# EAGLE board schematics (EAGLE 9.0.0)
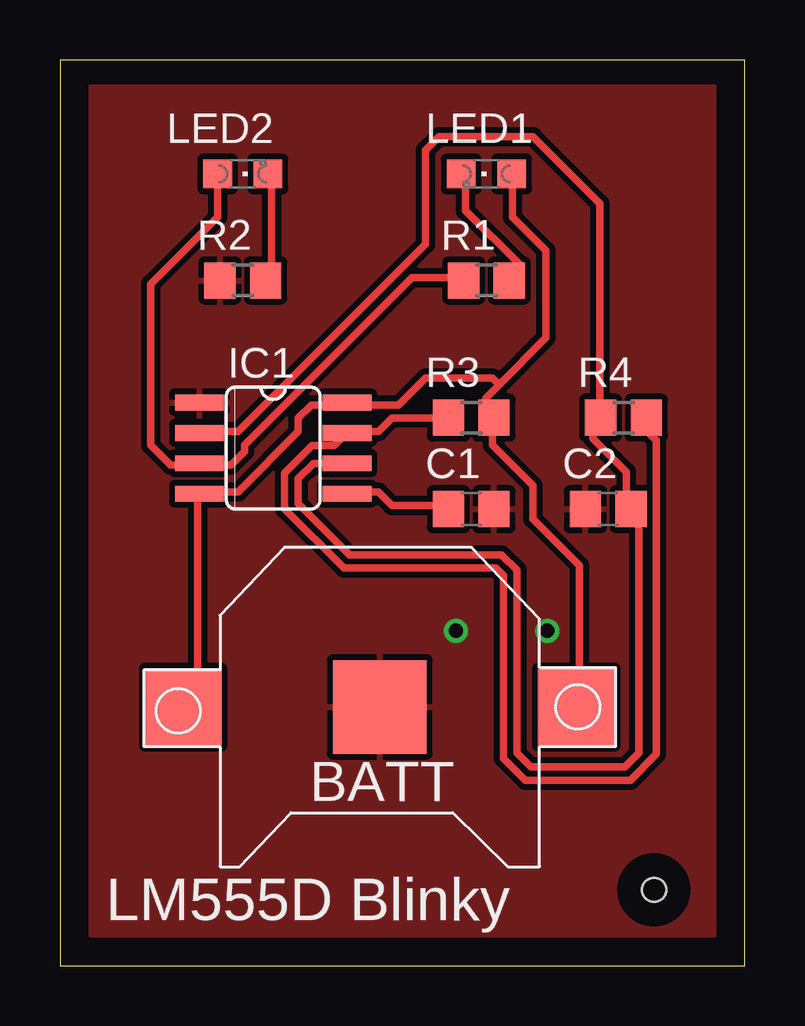
[diagram p0: board, top side]
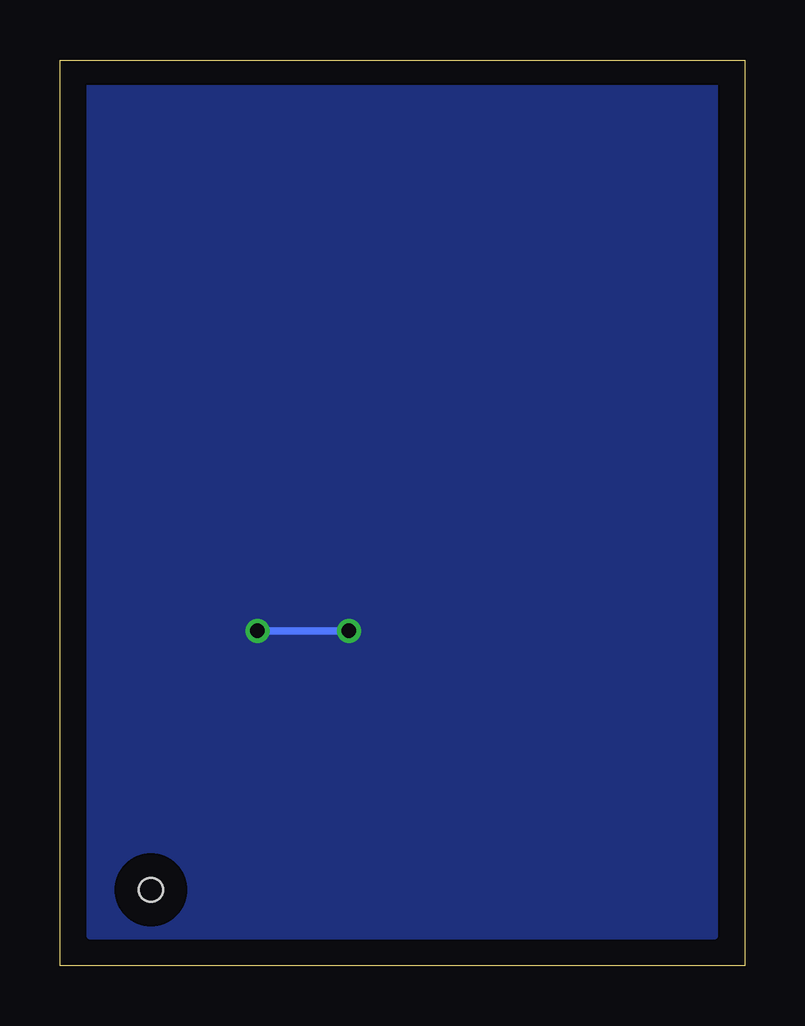
[diagram p1: board, bottom side, seen from below]

Size 28.55 x 37.77 mm. Coordinates in mm from the lower left corner, seen from the top.
Outline: 0,0 28.55,0 28.55,37.77 0,37.77 0,0
Copper layers (1*16): Top 0.035mm / dielectric 1.5mm / Bottom 0.035mm
Design rules "default": minimum track width 6mil, minimum drill 0.35mm, track to track 6mil, track to pad 6mil, pad to pad 6mil, via to via 6mil, smd to smd 6mil, copper to edge 40mil, drill to drill 6mil, minimum pad ring 10mil, minimum via ring 8mil, stop-mask expansion 4mil, vias tented up to drill 0mil, thermal gap 10mil
Net classes: 0 default: width 0.305 mm, drill 0.508 mm, clearance 0.254 mm
Holes 1 mm at 24.76,3.18

## Footprints (pad centres in the part's own frame; a part is rotated, then mirrored left to right if it is on the bottom)
CR1220-SMD = smd 3.2 x 3.2: +$1 -8.2,0; +$2 8.2,0 | smd 3.9 x 3.9: - 0,0
C0805 = smd 1.3 x 1.5: 1 -0.95,0; 2 0.95,0
SO08 = smd 0.66 x 2.032: 1 -1.905,-3.073; 2 -0.635,-3.073; 3 0.635,-3.073; 4 1.905,-3.073; 5 1.905,3.073; 6 0.635,3.073; 7 -0.635,3.073; 8 -1.905,3.073
CHIPLED_0805 = smd 1.2 x 1.2: A 0,-1.05; C 0,1.05
R0805 = smd 1.3 x 1.5: 1 -0.95,0; 2 0.95,0

## Placement (x,y rotation side)
BATT  CR1220  [CR1220-SMD]  13.34,10.79 180 top
C1  0.1uF  [C0805]  17.14,19.05 0 top
C2  22uF  [C0805]  22.86,19.05 180 top
IC1  LM555D  [SO08]  8.89,21.59 270 top
LED1  GREEN  [CHIPLED_0805]  17.78,33.02 90 top
LED2  GREEN  [CHIPLED_0805]  7.62,33.02 270 top
R1  100  [R0805]  17.78,28.57 0 top
R2  100  [R0805]  7.62,28.57 0 top
R3  1K  [R0805]  17.14,22.86 0 top
R4  100K  [R0805]  23.49,22.86 0 top

## Library data of the parts
BATT IC1 LED1 LED2 = adafruit
C1 C2 R1-R4 = resistor

## Nets
CONN: C2.1 IC1.2 IC1.6 R4.1
GND: BATT.- C1.2 C2.2 IC1.1 R2.1
N$1: IC1.3 LED2.A R1.1
N$2: LED1.C R1.2
N$3: LED2.C R2.2
N$4: IC1.7 R3.1 R4.2
N$7: C1.1 IC1.5
V+: BATT.+$1 BATT.+$2 IC1.4 IC1.8 LED1.A R3.2

## Tracks (layer width: path | path; a pad name or v marks a point on that pad's centre or on a via)
CONN
  Top 0.305: IC1.2 6.02,22.28 7.42,22.28 15.24,30.1 15.24,34.01 15.8,34.57 19.71,34.57 22.5,31.78 22.5,23.11 R4.1 22.5,22.84 22.22,22.55 22.22,22 23.62,20.6 23.62,19.2 C2.1 24.13,18.73 24.13,8.89 23.55,8.31 19.63,8.31 19.05,8.89 19.05,16.51 18.41,17.14 12.06,17.14 9.93,19.28 9.93,20.32 10.57,20.96 IC1.6
GND  (via drill 0.6)
  Bottom 0.305: v16.51,13.97 v20.32,13.97
  pour Top: 1.27,36.83 1.27,1.27 27.3,1.27 27.3,36.83
  pour Bottom: 1.27,36.83 1.27,1.27 27.3,1.27 27.3,36.83
N$1
  Top 0.305: LED2.A 6.58,32.89 6.58,31.22 3.79,28.42 3.79,21.72 4.62,20.88 5.74,20.88 IC1.3 6.02,20.88 7.14,20.88 7.7,21.44 7.7,21.72 14.68,28.7 16.64,28.7 R1.1
N$2
  Top 0.305: LED1.C 16.92,32.89 16.92,31.5 19.15,29.26 19.15,28.98 18.87,28.7 R1.2
N$3
  Top 0.305: LED2.C 8.81,32.89 8.81,28.7 R2.2
N$4
  Top 0.305: R3.1 16.08,22.84 13.84,22.84 13.28,22.28 12.17,22.28 IC1.7 11.43,21.69 10.51,21.69 9.37,20.55 9.37,19.05 11.83,16.59 18.18,16.59 18.49,16.28 18.49,8.66 19.4,7.75 23.78,7.75 24.87,8.84 24.87,21.91 24.44,22.33 R4.2
N$7
  Top 0.305: C1.1 16.08,19.2 13.84,19.2 13.28,19.76 12.17,19.76 IC1.5
V+
  Top 0.305: BATT.+$2 5.18,10.82 5.74,11.38 5.74,19.48 IC1.4 6.02,19.76 7.42,19.76 9.93,22.28 9.93,22.84 10.49,23.39 11.89,23.39 IC1.8 12.17,23.39 14.12,23.39 15.24,24.51 18.03,24.51 18.31,24.23 | 18.31,24.23 17.75,23.67 17.75,23.39 18.03,23.11 R3.2 18.03,22.84 18.03,21.72 19.71,20.04 19.71,18.64 21.67,16.69 21.67,10.82 BATT.+$1 | 18.31,24.23 20.27,26.19 20.27,29.82 18.87,31.22 18.87,32.89 LED1.A

## Text on the board
_tsilk: LM555D Blinky